# Altium PCB BEAGLEPLAYV020_220915.brd.PcbDoc (part 7 of 12)
Units mil, origin at the board's own origin, x right, y up, seen from the top; angles counter-clockwise.
Board outline 3149.7 x 3149.7 mil, 8 copper layers (TOP, LYR2_GND, LYR3, LAY4_PWR1, LAY5_PWR2, LAY6, LYR7_GND, BOTTOM), stack 60.84 mil thick; 782 components, 546 nets, 2864 pads, 2056 vias.
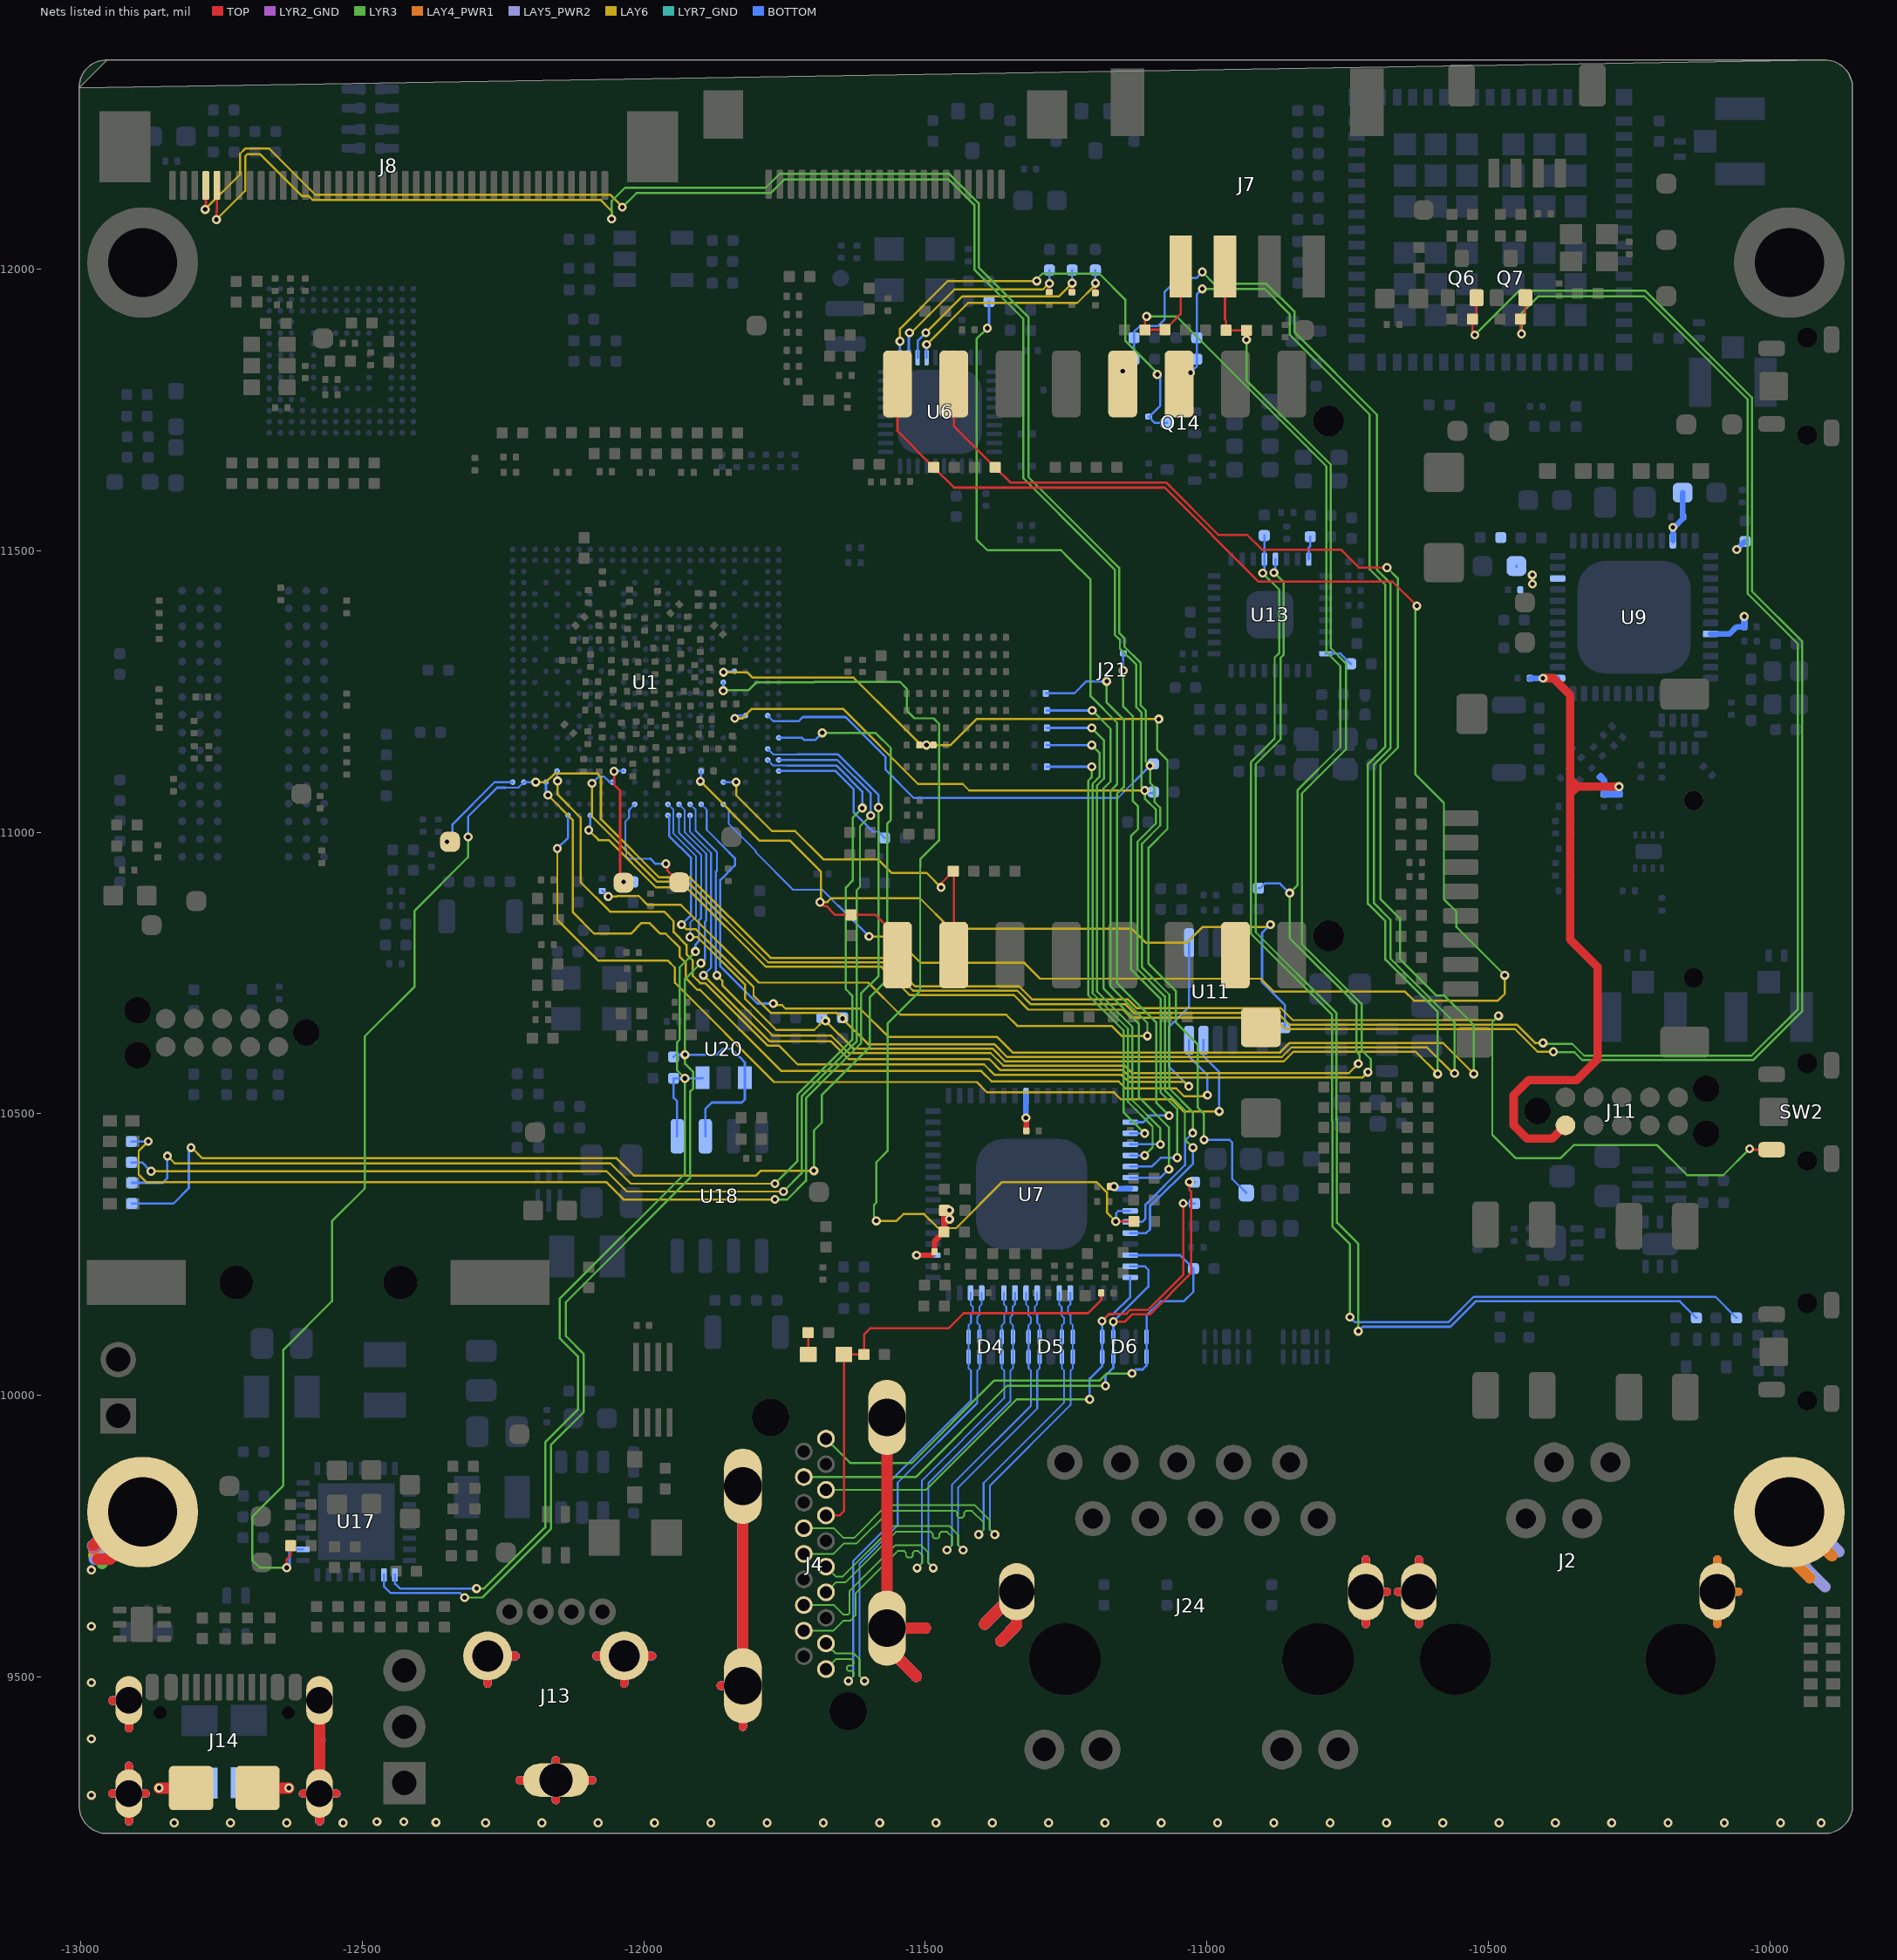
[diagram p13: the nets of this part, all layers, seen from the top]

## Via types
v1: diameter 16/0/16/0/0/0/0/16 (per signal layer), hole 8, TOP to BOTTOM, 334 vias
v2: diameter 16/16/0/0/0/0/16/16 (per signal layer), hole 8, TOP to BOTTOM, 282 vias
v3: diameter 16/0/0/0/0/16/0/16 (per signal layer), hole 8, TOP to BOTTOM, 255 vias
v4: diameter 16/16/0/0/0/16/16/16 (per signal layer), hole 8, TOP to BOTTOM, 253 vias
v5: diameter 16, hole 8, TOP to BOTTOM, 212 vias
v6: diameter 16/16/16/0/0/16/16/16 (per signal layer), hole 8, TOP to BOTTOM, 173 vias
v7: diameter 16/0/0/16/0/0/0/16 (per signal layer), hole 8, TOP to BOTTOM, 131 vias
v8: diameter 16/0/0/0/16/0/0/16 (per signal layer), hole 8, TOP to BOTTOM, 98 vias
v9: diameter 16/16/0/16/0/0/16/16 (per signal layer), hole 8, TOP to BOTTOM, 93 vias
v10: diameter 16/0/16/0/0/16/0/16 (per signal layer), hole 8, TOP to BOTTOM, 87 vias
v11: diameter 16/16/0/16/0/16/16/16 (per signal layer), hole 8, TOP to BOTTOM, 44 vias
v12: diameter 16/16/16/16/0/16/16/16 (per signal layer), hole 8, TOP to BOTTOM, 40 vias
v13: diameter 16/16/16/0/0/0/16/16 (per signal layer), hole 8, TOP to BOTTOM, 19 vias
v14: diameter 16/0/0/16/0/16/0/16 (per signal layer), hole 8, TOP to BOTTOM, 15 vias
v15: diameter 16/0/0/0/16/16/0/16 (per signal layer), hole 8, TOP to BOTTOM, 13 vias
v16: diameter 16/0/16/0/16/0/0/16 (per signal layer), hole 8, TOP to BOTTOM, 3 vias
v17: diameter 16/0/16/16/0/0/0/16 (per signal layer), hole 8, TOP to BOTTOM, 3 vias
v18: diameter 16/16/16/16/0/0/16/16 (per signal layer), hole 8, TOP to BOTTOM, 1 vias

## Nets (pads, with @x,y where several pads share a name; then routed paths per layer and width w, separated by ;. In a path a pad name is that pad's centre, name@x,y a point inside that pad or via, vN(x,y) a via of type N, cw(c..) or ccw(c..) an arc to the next point about the centre after c; other vN are vias at no path point) (continued)
GND_EARTH: C105.2 J2.S1 J2.S2 J4.20 J4.21 J4.22 J4.23 J13.5 J13.6 J13.7 J14.S1 J14.S2 J14.S3 J14.S4 J14.S5 J14.S6 J24.15 J24.16 MH1.1 MH2.1 R38.2 | length 18994.3
  TOP w14: -12943.93,9292.99 J14.S1@-12914.29,9292.99 ; -12943.93,9458.35 J14.S2@-12914.29,9458.35 -12914.29,9409.02 ; -12914.29,9243.66 J14.S1@-12914.29,9292.99 ; -12914.29,9342.32 J14.S1@-12914.29,9292.99 ; -12884.65,9292.99 J14.S1@-12914.29,9292.99 ; -12605.35,9292.99 J14.S3@-12575.71,9292.99 ; -12575.71,9243.66 J14.S3@-12575.71,9292.99 ; -12546.07,9292.99 J14.S3@-12575.71,9292.99 ; -12277.26,9487.93 J13.6@-12277.26,9537.26 -12227.93,9537.26 ; -12220.52,9316.79 J13.7@-12156,9316.79 ; -12156,9281.24 J13.7@-12156,9316.79 ; -12156,9352.34 J13.7@-12156,9316.79 ; -12091.48,9316.79 J13.7@-12156,9316.79 ; -12084.07,9537.26 J13.5@-12034.74,9537.26 ; -12034.74,9487.93 J13.5@-12034.74,9537.26 ; -11985.41,9537.26 J13.5@-12034.74,9537.26 ; -11863.45,9484.44 J4.20@-11823.96,9484.44 -11823.96,9411.49 ; -10717.54,9594.08 J24.16@-10717.54,9651.28 ; -10717.54,9708.48 J24.16@-10717.54,9651.28 ; -10680.02,9651.28 J24.16@-10717.54,9651.28 ; -10660.9,9651.28 J2.S1@-10623.38,9651.28 ; -10623.38,9594.08 J2.S1@-10623.38,9651.28 ; -10623.38,9708.48 J2.S1@-10623.38,9651.28
  TOP w20: -12978,9733 -12918,9793 MH2.1@-12890,9793 -12890,9767 -12947.79,9709.21 -12969.79,9709.21 ; v5(-12860.83,9302.83) J14.S5@-12804.06,9302.83 ; J14.S6@-12685.94,9302.83 v5(-12630.17,9302.83) ; J14.S3@-12575.71,9292.99 J14.S4@-12575.71,9458.35 ; J4.20@-11823.96,9484.44 J4.21@-11823.96,9838.77 ; J4.23@-11568.06,9960.81 J4.22@-11568.06,9586.8 ; -11516,9501 -11568.06,9553.06 J4.22@-11568.06,9586.8 ; -11499.8,9586.8 J4.22@-11568.06,9586.8 ; -11394.9,9594 J24.15@-11337.62,9651.28 -11337.62,9592.38 -11366,9564
  LYR2_GND w15: -12943.93,9292.99 J14.S1@-12914.29,9292.99 ; -12943.93,9458.35 J14.S2@-12914.29,9458.35 -12914.29,9409.02 ; -12914.29,9243.66 J14.S1@-12914.29,9292.99 ; -12914.29,9342.32 J14.S1@-12914.29,9292.99 ; -12884.65,9292.99 J14.S1@-12914.29,9292.99 ; -12605.35,9292.99 J14.S3@-12575.71,9292.99 ; -12575.71,9243.66 J14.S3@-12575.71,9292.99 ; -12575.71,9342.32 J14.S3@-12575.71,9292.99 ; -12546.07,9292.99 J14.S3@-12575.71,9292.99 ; -12277.26,9487.93 J13.6@-12277.26,9537.26 -12227.93,9537.26 ; -12220.52,9316.79 J13.7@-12156,9316.79 ; -12156,9281.24 J13.7@-12156,9316.79 ; -12156,9352.34 J13.7@-12156,9316.79 ; -12091.48,9316.79 J13.7@-12156,9316.79 ; -12084.07,9537.26 J13.5@-12034.74,9537.26 ; -12034.74,9487.93 J13.5@-12034.74,9537.26 ; -11985.41,9537.26 J13.5@-12034.74,9537.26 ; -11863.45,9484.44 J4.20@-11823.96,9484.44 -11823.96,9411.49 ; -10717.54,9594.08 J24.16@-10717.54,9651.28 ; -10717.54,9708.48 J24.16@-10717.54,9651.28 ; -10680.02,9651.28 J24.16@-10717.54,9651.28 ; -10660.9,9651.28 J2.S1@-10623.38,9651.28 ; -10623.38,9594.08 J2.S1@-10623.38,9651.28 ; -10623.38,9708.48 J2.S1@-10623.38,9651.28
  LYR2_GND w20: -12978,9730 -12915,9793 MH2.1@-12890,9793 ; J4.20@-11823.96,9484.44 J4.21@-11823.96,9838.77 ; -11516,9501 -11568.06,9553.06 J4.22@-11568.06,9586.8 -11499.8,9586.8 ; -11394.9,9594 J24.15@-11337.62,9651.28 -11337.62,9592.38 -11366,9564
  LYR3 w13.8: -12943.93,9292.99 J14.S1@-12914.29,9292.99 ; -12943.93,9458.35 J14.S2@-12914.29,9458.35 -12914.29,9409.02 ; -12914.29,9243.66 J14.S1@-12914.29,9292.99 ; -12914.29,9342.32 J14.S1@-12914.29,9292.99 ; -12884.65,9292.99 J14.S1@-12914.29,9292.99 ; -12605.35,9292.99 J14.S3@-12575.71,9292.99 ; -12575.71,9243.66 J14.S3@-12575.71,9292.99 ; -12546.07,9292.99 J14.S3@-12575.71,9292.99 ; -12277.26,9487.93 J13.6@-12277.26,9537.26 -12227.93,9537.26 ; -12220.52,9316.79 J13.7@-12156,9316.79 ; -12156,9281.24 J13.7@-12156,9316.79 ; -12156,9352.34 J13.7@-12156,9316.79 ; -12091.48,9316.79 J13.7@-12156,9316.79 ; -12084.07,9537.26 J13.5@-12034.74,9537.26 ; -12034.74,9487.93 J13.5@-12034.74,9537.26 ; -11985.41,9537.26 J13.5@-12034.74,9537.26 ; -11863.45,9484.44 J4.20@-11823.96,9484.44 -11823.96,9411.49 ; -10717.54,9594.08 J24.16@-10717.54,9651.28 ; -10717.54,9708.48 J24.16@-10717.54,9651.28 ; -10680.02,9651.28 J24.16@-10717.54,9651.28 ; -10660.9,9651.28 J2.S1@-10623.38,9651.28 ; -10623.38,9594.08 J2.S1@-10623.38,9651.28 ; -10623.38,9708.48 J2.S1@-10623.38,9651.28
  LYR3 w20: -12978,9730 -12915,9793 MH2.1@-12890,9793 -12890,9774 -12962.29,9701.71 ; J14.S3@-12575.71,9292.99 J14.S4@-12575.71,9458.35 ; J4.20@-11823.96,9484.44 J4.21@-11823.96,9838.77 ; -11516,9501 -11568.06,9553.06 J4.22@-11568.06,9586.8 -11499.8,9586.8 ; -11394.9,9594 J24.15@-11337.62,9651.28 -11337.62,9592.38 -11366,9564
  LAY4_PWR1 w15: -12943.93,9292.99 J14.S1@-12914.29,9292.99 ; -12943.93,9458.35 J14.S2@-12914.29,9458.35 -12914.29,9409.02 ; -12914.29,9243.66 J14.S1@-12914.29,9292.99 ; -12914.29,9342.32 J14.S1@-12914.29,9292.99 ; -12884.65,9292.99 J14.S1@-12914.29,9292.99 ; -12605.35,9292.99 J14.S3@-12575.71,9292.99 ; -12575.71,9243.66 J14.S3@-12575.71,9292.99 ; -12546.07,9292.99 J14.S3@-12575.71,9292.99 ; -12277.26,9487.93 J13.6@-12277.26,9537.26 -12227.93,9537.26 ; -12220.52,9316.79 J13.7@-12156,9316.79 ; -12156,9281.24 J13.7@-12156,9316.79 ; -12156,9352.34 J13.7@-12156,9316.79 ; -12091.48,9316.79 J13.7@-12156,9316.79 ; -12084.07,9537.26 J13.5@-12034.74,9537.26 ; -12034.74,9487.93 J13.5@-12034.74,9537.26 ; -11985.41,9537.26 J13.5@-12034.74,9537.26 ; -11863.45,9484.44 J4.20@-11823.96,9484.44 -11823.96,9411.49 ; -10717.54,9594.08 J24.16@-10717.54,9651.28 ; -10717.54,9708.48 J24.16@-10717.54,9651.28 ; -10680.02,9651.28 J24.16@-10717.54,9651.28 ; -10660.9,9651.28 J2.S1@-10623.38,9651.28 ; -10623.38,9594.08 J2.S1@-10623.38,9651.28 ; -10623.38,9708.48 J2.S1@-10623.38,9651.28 ; -10093.46,9594.08 J2.S2@-10093.46,9651.28 ; -10093.46,9708.48 J2.S2@-10093.46,9651.28 ; -10055.94,9651.28 J2.S2@-10093.46,9651.28
  LAY4_PWR1 w20: -12977,9725 -12909,9793 MH2.1@-12890,9793 ; J14.S3@-12575.71,9292.99 J14.S4@-12575.71,9458.35 ; J4.20@-11823.96,9484.44 J4.21@-11823.96,9838.77 ; -11516,9501 -11568.06,9553.06 J4.22@-11568.06,9586.8 -11499.8,9586.8 ; -11394.9,9594 J24.15@-11337.62,9651.28 -11337.62,9592.38 -11366,9564 ; MH1.1@-9965.3,9793 MH1.1@-9965.3,9790.3 ; -9929,9676 -9965.3,9712.3 MH1.1@-9965.3,9790.3 ; -9890,9715 MH1.1@-9965.3,9790.3
  LAY5_PWR2 w15: -12943.93,9292.99 J14.S1@-12914.29,9292.99 ; -12943.93,9458.35 J14.S2@-12914.29,9458.35 -12914.29,9409.02 ; -12914.29,9243.66 J14.S1@-12914.29,9292.99 ; -12914.29,9342.32 J14.S1@-12914.29,9292.99 ; -12884.65,9292.99 J14.S1@-12914.29,9292.99 ; -12605.35,9292.99 J14.S3@-12575.71,9292.99 ; -12575.71,9243.66 J14.S3@-12575.71,9292.99 ; -12546.07,9292.99 J14.S3@-12575.71,9292.99 ; -12277.26,9487.93 J13.6@-12277.26,9537.26 -12227.93,9537.26 ; -12220.52,9316.79 J13.7@-12156,9316.79 ; -12156,9281.24 J13.7@-12156,9316.79 ; -12156,9352.34 J13.7@-12156,9316.79 ; -12091.48,9316.79 J13.7@-12156,9316.79 ; -12084.07,9537.26 J13.5@-12034.74,9537.26 ; -12034.74,9487.93 J13.5@-12034.74,9537.26 ; -11985.41,9537.26 J13.5@-12034.74,9537.26 ; -11863.45,9484.44 J4.20@-11823.96,9484.44 -11823.96,9411.49 ; -10717.54,9594.08 J24.16@-10717.54,9651.28 ; -10717.54,9708.48 J24.16@-10717.54,9651.28 ; -10680.02,9651.28 J24.16@-10717.54,9651.28 ; -10660.9,9651.28 J2.S1@-10623.38,9651.28 ; -10623.38,9594.08 J2.S1@-10623.38,9651.28 ; -10623.38,9708.48 J2.S1@-10623.38,9651.28 ; -10093.46,9594.08 J2.S2@-10093.46,9651.28 ; -10093.46,9708.48 J2.S2@-10093.46,9651.28 ; -10055.94,9651.28 J2.S2@-10093.46,9651.28
  LAY5_PWR2 w20: -12974.5,9711.5 -12893,9793 MH2.1@-12890,9793 ; J14.S3@-12575.71,9292.99 J14.S4@-12575.71,9458.35 ; J4.20@-11823.96,9484.44 J4.21@-11823.96,9838.77 ; -11516,9501 -11568.06,9553.06 J4.22@-11568.06,9586.8 -11499.8,9586.8 ; -11394.9,9594 J24.15@-11337.62,9651.28 -11337.62,9592.38 -11366,9564 ; -9902,9660 -9965.3,9723.3 MH1.1@-9965.3,9793 -9948,9793 -9877.5,9722.5
  LAY6 w13.8: -12943.93,9292.99 J14.S1@-12914.29,9292.99 ; -12943.93,9458.35 J14.S2@-12914.29,9458.35 -12914.29,9409.02 ; -12914.29,9243.66 J14.S1@-12914.29,9292.99 ; -12914.29,9342.32 J14.S1@-12914.29,9292.99 ; -12884.65,9292.99 J14.S1@-12914.29,9292.99 ; -12605.35,9292.99 J14.S3@-12575.71,9292.99 ; -12575.71,9243.66 J14.S3@-12575.71,9292.99 ; -12546.07,9292.99 J14.S3@-12575.71,9292.99 ; -12277.26,9487.93 J13.6@-12277.26,9537.26 -12227.93,9537.26 ; -12220.52,9316.79 J13.7@-12156,9316.79 ; -12156,9281.24 J13.7@-12156,9316.79 ; -12156,9352.34 J13.7@-12156,9316.79 ; -12091.48,9316.79 J13.7@-12156,9316.79 ; -12084.07,9537.26 J13.5@-12034.74,9537.26 ; -12034.74,9487.93 J13.5@-12034.74,9537.26 ; -11985.41,9537.26 J13.5@-12034.74,9537.26 ; -11863.45,9484.44 J4.20@-11823.96,9484.44 -11823.96,9411.49 ; -10717.54,9594.08 J24.16@-10717.54,9651.28 ; -10717.54,9708.48 J24.16@-10717.54,9651.28 ; -10680.02,9651.28 J24.16@-10717.54,9651.28 ; -10660.9,9651.28 J2.S1@-10623.38,9651.28 ; -10623.38,9594.08 J2.S1@-10623.38,9651.28 ; -10623.38,9708.48 J2.S1@-10623.38,9651.28
  LAY6 w20: -12977,9716 -12900,9793 MH2.1@-12890,9793 ; J14.S3@-12575.71,9292.99 J14.S4@-12575.71,9458.35 ; J4.20@-11823.96,9484.44 J4.21@-11823.96,9838.77 ; -11516,9501 -11568.06,9553.06 J4.22@-11568.06,9586.8 -11499.8,9586.8 ; -11394.9,9594 J24.15@-11337.62,9651.28 -11337.62,9592.38 -11366,9564
  LYR7_GND w15: -12943.93,9292.99 J14.S1@-12914.29,9292.99 ; -12943.93,9458.35 J14.S2@-12914.29,9458.35 -12914.29,9409.02 ; -12914.29,9243.66 J14.S1@-12914.29,9292.99 ; -12914.29,9342.32 J14.S1@-12914.29,9292.99 ; -12884.65,9292.99 J14.S1@-12914.29,9292.99 ; -12605.35,9292.99 J14.S3@-12575.71,9292.99 ; -12575.71,9243.66 J14.S3@-12575.71,9292.99 ; -12546.07,9292.99 J14.S3@-12575.71,9292.99 ; -12277.26,9487.93 J13.6@-12277.26,9537.26 -12227.93,9537.26 ; -12220.52,9316.79 J13.7@-12156,9316.79 ; -12156,9281.24 J13.7@-12156,9316.79 ; -12156,9352.34 J13.7@-12156,9316.79 ; -12091.48,9316.79 J13.7@-12156,9316.79 ; -12084.07,9537.26 J13.5@-12034.74,9537.26 ; -12034.74,9487.93 J13.5@-12034.74,9537.26 ; -11985.41,9537.26 J13.5@-12034.74,9537.26 ; -11863.45,9484.44 J4.20@-11823.96,9484.44 -11823.96,9411.49 ; -10717.54,9594.08 J24.16@-10717.54,9651.28 ; -10717.54,9708.48 J24.16@-10717.54,9651.28 ; -10680.02,9651.28 J24.16@-10717.54,9651.28 ; -10660.9,9651.28 J2.S1@-10623.38,9651.28 ; -10623.38,9594.08 J2.S1@-10623.38,9651.28 ; -10623.38,9708.48 J2.S1@-10623.38,9651.28
  LYR7_GND w20: -12979,9733 -12919,9793 MH2.1@-12890,9793 ; J14.S3@-12575.71,9292.99 J14.S4@-12575.71,9458.35 ; J4.20@-11823.96,9484.44 J4.21@-11823.96,9838.77 ; -11516,9501 -11568.06,9553.06 J4.22@-11568.06,9586.8 -11499.8,9586.8 ; -11394.9,9594 J24.15@-11337.62,9651.28 -11337.62,9592.38 -11366,9564
  BOTTOM w14: -12943.93,9292.99 J14.S1@-12914.29,9292.99 ; -12943.93,9458.35 J14.S2@-12914.29,9458.35 -12914.29,9409.02 ; -12914.29,9243.66 J14.S1@-12914.29,9292.99 ; -12914.29,9342.32 J14.S1@-12914.29,9292.99 ; -12884.65,9292.99 J14.S1@-12914.29,9292.99 ; -12605.35,9292.99 J14.S3@-12575.71,9292.99 ; -12575.71,9243.66 J14.S3@-12575.71,9292.99 ; -12575.71,9342.32 J14.S3@-12575.71,9292.99 ; -12546.07,9292.99 J14.S3@-12575.71,9292.99 ; -12277.26,9487.93 J13.6@-12277.26,9537.26 -12227.93,9537.26 ; -12220.52,9316.79 J13.7@-12156,9316.79 ; -12156,9281.24 J13.7@-12156,9316.79 ; -12156,9352.34 J13.7@-12156,9316.79 ; -12091.48,9316.79 J13.7@-12156,9316.79 ; -12084.07,9537.26 J13.5@-12034.74,9537.26 ; -12034.74,9487.93 J13.5@-12034.74,9537.26 ; -11985.41,9537.26 J13.5@-12034.74,9537.26 ; -11863.45,9484.44 J4.20@-11823.96,9484.44 -11823.96,9411.49 ; -10717.54,9594.08 J24.16@-10717.54,9651.28 ; -10717.54,9708.48 J24.16@-10717.54,9651.28 ; -10680.02,9651.28 J24.16@-10717.54,9651.28 ; -10660.9,9651.28 J2.S1@-10623.38,9651.28 ; -10623.38,9594.08 J2.S1@-10623.38,9651.28 ; -10623.38,9708.48 J2.S1@-10623.38,9651.28
  BOTTOM w20: -12976,9709 -12974,9709 MH2.1@-12890,9793 ; J14.S4@-12575.71,9458.35 -12575.71,9388.71 -12575,9388 ; J4.20@-11823.96,9484.44 J4.21@-11823.96,9838.77 ; -11516,9501 -11568.06,9553.06 J4.22@-11568.06,9586.8 -11499.8,9586.8 ; -11394.9,9594 J24.15@-11337.62,9651.28 -11337.62,9592.38 -11366,9564
  other v5: -12834,9241 -12734,9241 -12634,9241 -12534,9241 -12281,9241 -12181,9241 -12081,9241 -11981,9241 -11881,9241 -11781,9241 -11681,9241 -11581,9241 -11481,9241 -11381,9241 -11281,9241 -11181,9241 -11081,9241 -10981,9241 -10881,9241 -10781,9241 -10681,9241 -10581,9241 -10481,9241 -10381,9241 -10281,9241 -10181,9241 -10081,9241 -9981,9241 -9909,9241 -12369,9242 -12474,9243 -12426,9243 -12981,9290 -12981,9390 -12981,9490 -12981,9590 -12981,9690
GPIO1: R116.1 U13.32 | length 41.2
  BOTTOM w4: U13.32@-10819.05,11485 -10819.05,11505.31 -10816.21,11508.15 R116.1@-10816.21,11525
GPIO1_9: D37.2 J21.7 U1.B18 | length 3699.3
  TOP w4: J21.7@-11449.39,11796.09 -11449.39,11721.6 D37.2@-11375.79,11648 -11348.79,11621 -11072.68,11621 -10979.68,11528 -10928,11528 -10902,11502 -10762,11502 -10730,11470 v1(-10680,11470)
  LYR3 w3.8: v1(-10680,11470) -10661,11451 -10661,11150 -10692,11119 -10692,10882 -10657,10847 -10657,10775 -10592,10710 -10578,10710 -10526,10658 v10(-10526,10571)
  LAY6 w3.8: v3(-11770,10695.9) -11767.1,10693 -11754.29,10693 -11748.29,10687 -11616,10687 -11565.8,10636.8 -11372.56,10636.8 -11344.76,10609 -10870,10609 -10853,10626 -10581,10626 v10(-10526,10571)
  BOTTOM w3.2: U1.B18@-11898.08,11049.66 -11888.28,11039.86 -11888.28,11004.17 -11848,10963.89
  BOTTOM w4: -11848,10963.89 -11838,10953.89 -11838,10940.99 -11864,10914.99 -11864,10762 -11797.9,10695.9 v3(-11770,10695.9)
GPIO1_10: D31.2 J21.9 R68.2 U1.E18 | length 1604.3
  TOP w4: v3(-11687,10876) -11680,10869 -11676,10869 -11660.21,10853.21 D31.2@-11632,10853.21 -11588.21,10853.21 -11549.39,10814.39 J21.9@-11549.39,10781.91
  LAY6 w3.8: v3(-11899.58,11090.68) -11793.9,10985 -11739.99,10985 -11685,10930.01 v3@-11685,10876 ; v3(-11687,10876) v3@-11685,10876 ; v3(-10887,10836) -10891,10832 -11007,10832 -11035,10804 -11108.69,10804 -11133.69,10829 -11455.69,10829 -11509.49,10882.8 -11667.2,10882.8 -11674,10876 v3@-11685,10876
  BOTTOM w4: v3(-11899.58,11090.68) -11898.08,11092.18 U1.E18@-11898.08,11108.72 ; v3(-10887,10836) -10902,10821 -10902,10734 -10861.44,10693.44 R68.2@-10861.44,10652.85
GPIO1_11: D36.2 J21.8 U1.B20 | length 3444.2
  TOP w4: J21.8@-11549.39,11796.09 -11549.39,11712.39 D36.2@-11485,11648 -11449,11612 -11075,11612 -10908,11445 -10670,11445 v1(-10627,11402)
  LYR3 w3.8: v1(-10627,11402) -10627,11400 -10630,11397 -10630,11103.01 -10579,11052.01 -10579,10881 -10557,10859 -10557,10832 v10(-10471,10746)
  LAY6 w3.8: v3(-11600,10815) -11555,10815 -11508,10768 -11324,10768 -11296,10740 -10904.05,10740 -10881.05,10717 -10648.12,10717 -10632.12,10701 -10483,10701 -10471,10713 v10(-10471,10746)
  BOTTOM w3.2: U1.B20@-11858.7,11049.66 -11848.9,11039.86 -11848.9,11014.7 -11801,10966.8 -11801,10964.01 -11734.99,10898 -11683,10898 -11655,10870
  BOTTOM w4: -11655,10870 v3(-11600,10815)
GPIO1_12: D45.2 J21.10 U1.D20 | length 665.2
  TOP w4: v3(-11472,10902) -11472,10909.21 D45.2@-11450.21,10931 cw(c-11452.19,10929.02) -11449.39,10929.02 J21.10@-11449.39,10781.91
  LAY6 w3.8: -11835.84,11065.72 -11772.12,11002 -11731,11002 -11681,10952 -11584.2,10952 -11560.2,10928 -11498,10928 v3(-11472,10902)
  LAY6 w4: -11835.84,11065.72 v3(-11835.84,11089.04)
  BOTTOM w4: U1.D20@-11858.7,11089.04 v3(-11835.84,11089.04)
GPIO2: R112.1 U13.8 | length 51.9
  BOTTOM w4: U13.8@-10789,11317.05 -10762.4,11317.05 R112.1@-10744.49,11299.14
HDMI_AVCC: C240.1 C241.1 C242.1 C275.1 FB18.1 U7.8 U7.35 U7.56 | length 284.3
  TOP w4: C240.1@-11172.4,10370.93 -11172.33,10371 v7(-11165,10371)
  TOP w10: v7(-11515.5,10248.98) -11489.49,10248.98 C241.1@-11483.6,10254.87 -11483.6,10273.74 C275.1@-11466.94,10290.4 -11466.94,10303.06 ; v7(-11321.33,10493) -11320.6,10492.27 C242.1@-11320.6,10469.67 ; -11466.94,10303.06 -11466.94,10327.6 FB18.1@-11465.94,10328.6 v7(-11457,10328.6) v7(-11457,10313) -11466.94,10303.06
  BOTTOM w10: v7(-11515.5,10248.98) -11515,10248.98 -11514.95,10248.93 U7.35@-11486.43,10248.93 ; v7(-11321.33,10493) -11321.07,10493.26 U7.56@-11321.07,10532.4 ; v7(-11165,10371) -11161.04,10367.04 U7.8@-11136.03,10367.04
HDMI_CEC: D7.2 D63.2 J4.13 R258.2 | length 844.2
  TOP w4: J4.13@-11676.32,9786.8 -11652.2,9786.8 -11644,9795 -11644,10071.93 D63.2@-11644.73,10072.66 D7.2@-11608.96,10072.66 -11608.96,10108.04 -11598,10119 -11459,10119 -11432,10146 -11211,10146 -11187.7,10169.3 R258.2@-11187.7,10182
HDMI_CEC_D: D63.1 R63.2 | length 38.9
  TOP w4: R63.2@-11708.21,10111.34 -11707.73,10110.86 D63.1@-11707.73,10072.66
HDMI_DSCL: D6.1 D6.10 J4.15 R65.2 U7.16 | length 1110.7
  TOP w4: v5(-11186.05,10132.06) -11173.11,10145 -11142.69,10145 -11135.82,10151.87 -11104.45,10151.87 -11042,10214.32 v5(-11042,10341)
  LYR3 w3.8: J4.15@-11676.32,9832.27 -11498.73,9832.27 -11338,9993 v1(-11208,9993)
  BOTTOM w4: v1(-11208,9993) -11208,10030 -11185.76,10052.24 D6.10@-11185.76,10068.65 D6.1@-11185.76,10104.09 -11185.76,10131.77 v5(-11186.05,10132.06) -11173.11,10145 -11166,10145 -11136.03,10174.97 U7.16@-11136.03,10209.56 ; v5(-11042,10341) -11041.86,10340.86 R65.2@-11021.85,10340.86
HDMI_DSDA: D6.2 D6.9 J4.16 R64.2 U7.15 | length 1220.9
  TOP w4: v5(-11166.08,10130.92) -11145.45,10130.92 -11132.5,10143.87 -11101.13,10143.87 -11028,10217 -11028,10362 -11031,10365 v5(-11031,10378.86)
  LYR3 w3.8: J4.16@-11715.7,9855.03 -11516.97,9855.03 -11355,10017 v1(-11180,10017)
  BOTTOM w4: v1(-11180,10017) -11180,10035 -11166.08,10048.92 D6.9@-11166.08,10068.65 D6.2@-11166.08,10104.09 v5(-11166.08,10130.92) -11104,10193 -11104,10223 -11110.25,10229.25 U7.15@-11136.03,10229.25 ; v5(-11031,10378.86) R64.2@-11021.81,10378.86
HDMI_HPD: D6.5 D6.6 J4.19 R66.1 U7.14 | length 1011.7
  LYR3 w3.8: J4.19@-11676.32,9923.22 -11633.1,9880 -11524,9880 -11378,10026 -11190.66,10026 -11177.66,10039 v1(-11133,10039)
  BOTTOM w4: U7.14@-11136.03,10248.93 -11047.48,10248.93 R66.1@-11023.69,10225.14 -11023.69,10184.31 -11041,10167 -11082,10167 -11107.02,10141.98 D6.5@-11107.02,10104.09 D6.6@-11107.02,10068.65 -11107.02,10052.98 -11114,10046 -11126,10046 v1(-11133,10039)
HDMI_INT: R257.2 U1.N20 U7.10 | length 1988.6
  TOP w4: v3(-11161.81,10309) R257.2@-11129.41,10309
  LYR3 w3.8: -11697,11267 -11545,11267 -11533,11255 -11533,11216 -11519.36,11202.36 -11485.36,11202.36 -11475.66,11192.66 -11475.66,10985.34 -11509.1,10951.9 -11509.1,10938.24 ; v10(-11586.9,10310) -11591.2,10314.3 -11591.2,10338 -11586.9,10342.3 -11586.9,10414.19 -11567,10434.09 -11567,10660.26 -11509.13,10718.13 -11509.13,10938.21
  LYR3 w4: v1(-11858.7,11251.3) -11858.02,11251.98 -11814.42,11251.98 -11800.4,11266 -11698,11266 -11697,11267
  LAY6 w3.8: v10(-11586.9,10310) -11551,10310 -11539,10322 -11502,10322 -11477,10297 -11445.31,10297 -11363.51,10378.8 -11195.8,10378.8 -11177.54,10360.54 -11177.54,10324.73 v3(-11161.81,10309)
  BOTTOM w4: v1(-11858.7,11251.3) U1.N20@-11858.7,11266.2 ; v3(-11161.81,10309) -11161,10309.81 -11161,10323.67 -11157,10327.67 U7.10@-11136.03,10327.67
HDMI_RSTN: D58.2 R177.2 R194.1 U1.P21 | length 1853.5
  TOP w4: R177.2@-11510.9,11154.86 v3(-11498,11154.86) R194.1@-11485.4,11154.86
  LYR3 w3.8: v10(-11085.3,11201) -11088,11198.3 -11088,11145.79 -11070,11127.79 -11070,11005.99 -11103.4,10972.59 -11103.4,10766.41 -11054.8,10717.81 -11054.8,10662 -11016,10623.2 -11016,10510.77 -11005,10499.77 v1(-11005,10454)
  LAY6 w3.8: -11661.97,11274.45 -11627.18,11274.45 -11549.39,11196.66 ; -11549.34,11196.66 -11507.54,11154.86 ; v3(-11498,11154.86) -11455.14,11154.86 -11409,11201 v10(-11085.3,11201)
  LAY6 w4: v3(-11858.4,11284.28) -11816.27,11284.28 -11806.44,11274.45 -11661.97,11274.45 ; -11507.54,11154.86 v3(-11498,11154.86)
  BOTTOM w4: v3(-11858.4,11284.28) -11856.8,11285.88 U1.P21@-11839.02,11285.88 ; v1(-11005,10454) -10960,10454 -10955,10449 -10955,10384.5 D58.2@-10930,10359.5
HDMI_TX0+: D5.1 D5.10 J4.7 U7.25 | length 840.9
  LYR3 w3: J4.7@-11676.32,9650.38 -11658.74,9667.96 -11642.04,9667.96 -11552.3,9757.7 -11489.87,9757.7 -11486.87,9754.7 -11486.87,9749 -11483.87,9746 -11477.87,9746 -11474.87,9749 -11474.87,9754.7 -11471.87,9757.7 -11461.3,9757.7 -11452.3,9748.7 -11452.3,9734.66 v1(-11461.47,9725.49)
  BOTTOM w3.3: v1(-11461.47,9725.49) -11452.8,9734.16 -11452.8,9841.19 -11312.45,9981.54 -11312.45,10044.03 -11316.64,10048.22 D5.10@-11316.64,10068.65 D5.1@-11316.64,10104.09 -11316.64,10124.52 -11312.45,10128.71 -11312.45,10137.88 -11316.88,10142.31 -11316.88,10157.38 -11321.07,10161.57 U7.25@-11321.07,10182
HDMI_TX0-: D5.2 D5.9 J4.9 U7.24 | length 841.6
  LYR3 w3: J4.9@-11676.32,9695.85 -11658.73,9678.26 -11646.31,9678.26 -11556.57,9768 -11457.03,9768 -11442,9752.97 -11442,9734.67 v1(-11432.82,9725.49)
  BOTTOM w3.3: v1(-11432.82,9725.49) -11441.5,9734.17 -11441.5,9836.5 -11301.15,9976.85 -11301.15,10044.03 -11296.96,10048.22 D5.9@-11296.96,10068.65 D5.2@-11296.96,10104.09 -11296.96,10124.52 -11301.15,10128.71 -11301.15,10142.57 -11305.58,10147 -11305.58,10157.38 -11301.39,10161.57 U7.24@-11301.39,10182
HDMI_TX1+: D4.4 D4.7 J4.4 U7.27 | length 897.4
  LYR3 w3: J4.4@-11715.7,9582.19 -11663.09,9582.19 -11645,9600.28 -11633.03,9600.28 -11624,9609.31 -11624,9648.43 -11548.73,9723.7 -11537.31,9723.7 -11534.31,9720.7 -11534.31,9715 -11531.31,9712 -11525.31,9712 -11522.31,9715 -11522.31,9720.7 -11519.31,9723.7 -11512.31,9723.7 -11505.3,9716.69 -11505.3,9702.67 v1(-11514.47,9693.5)
  BOTTOM w3.3: v1(-11514.47,9693.5) -11505.79,9702.18 -11505.79,9849.2 -11359.92,9995.07 -11359.92,10044.03 -11364.11,10048.22 D4.7@-11364.11,10068.65 D4.4@-11364.11,10104.09 -11364.11,10124.52 -11359.92,10128.71 -11359.92,10144.07 -11356.25,10147.74 -11356.25,10157.38 -11360.44,10161.57 U7.27@-11360.44,10182
HDMI_TX1-: D4.5 D4.6 J4.6 U7.26 | length 897.7
  LYR3 w3: J4.6@-11715.7,9627.66 -11662.08,9627.66 -11645,9610.58 -11637.3,9610.58 -11634.3,9613.58 -11634.3,9652.7 -11553,9734 -11508.04,9734 -11495,9720.96 -11495,9702.68 v1(-11485.82,9693.5)
  BOTTOM w3.3: v1(-11485.82,9693.5) -11494.49,9702.17 -11494.49,9844.51 -11348.62,9990.38 -11348.62,10044.03 -11344.43,10048.22 D4.6@-11344.43,10068.65 D4.5@-11344.43,10104.09 -11344.43,10124.52 -11348.62,10128.71 -11348.62,10139.38 -11344.95,10143.05 -11344.95,10157.38 -11340.76,10161.57 U7.26@-11340.76,10182
HDMI_TX2+: D4.1 D4.10 J4.1 U7.30 | length 900.2
  LYR3 w3: J4.1@-11676.32,9513.96 -11658.73,9531.55 -11631.29,9531.55 -11627.3,9527.56 -11627.3,9522.7 -11630,9520 -11637,9520 -11639,9518 -11639,9513 -11636.87,9510.87 -11630.17,9510.87 -11627.3,9508 -11627.3,9501.99 v1(-11636.47,9492.82)
  BOTTOM w3.3: v1(-11636.47,9492.82) -11627.95,9501.34 -11627.95,9706.04 -11560.3,9773.69 -11560.3,9849.69 -11418.98,9991.01 -11418.98,10044.03 -11423.17,10048.22 D4.10@-11423.17,10068.65 D4.1@-11423.17,10104.09 -11423.17,10124.52 -11418.98,10128.71 -11418.98,10144.07 -11415.31,10147.74 -11415.31,10157.37 -11419.5,10161.56 U7.30@-11419.5,10182
HDMI_TX2-: D4.2 D4.9 J4.3 U7.29 | length 899.7
  LYR3 w3: J4.3@-11676.32,9559.44 -11658.73,9541.85 -11627.02,9541.85 -11617,9531.83 -11617,9502 v1(-11607.82,9492.82)
  BOTTOM w3.3: v1(-11607.82,9492.82) -11616.65,9501.65 -11616.65,9701.35 -11549,9769 -11549,9845 -11407.68,9986.32 -11407.68,10044.03 -11403.49,10048.22 D4.9@-11403.49,10068.65 D4.2@-11403.49,10104.09 -11403.49,10124.52 -11407.68,10128.71 -11407.68,10139.38 -11404.01,10143.05 -11404.01,10157.37 -11399.81,10161.57 U7.29@-11399.81,10182
HDMI_TXC+: D5.4 D5.7 J4.10 U7.22 | length 900.7
  LYR3 w3: J4.10@-11715.7,9718.61 -11663.09,9718.61 -11645,9736.7 -11622.3,9736.7 -11564,9795 -11446.25,9795 -11443.25,9792 -11443.25,9786 -11440.25,9783 -11434.25,9783 -11431.25,9786 -11431.25,9792 -11428.25,9795 -11417,9795 -11396,9774 -11396,9762.18 v1(-11405.18,9753)
  BOTTOM w3.3: v1(-11405.18,9753) -11396.5,9761.68 -11396.5,9844.5 -11253.39,9987.61 -11253.39,10044.03 -11257.58,10048.22 D5.7@-11257.58,10068.65 D5.4@-11257.58,10104.09 -11257.58,10124.52 -11253.39,10128.71 -11253.39,10137.38 -11257.83,10141.82 -11257.83,10157.37 -11262.02,10161.56 U7.22@-11262.02,10182
HDMI_TXC-: D5.5 D5.6 J4.12 U7.21 | length 900.4
  LYR3 w3: J4.12@-11715.7,9764.08 -11662.08,9764.08 -11645,9747 -11626.57,9747 -11568.27,9805.3 -11412.73,9805.3 -11385.7,9778.27 -11385.7,9762.17 v1(-11376.53,9753)
  BOTTOM w3.3: v1(-11376.53,9753) -11385.2,9761.67 -11385.2,9839.81 -11242.09,9982.92 -11242.09,10044.03 -11237.9,10048.22 D5.6@-11237.9,10068.65 D5.5@-11237.9,10104.09 -11237.9,10124.52 -11242.09,10128.71 -11242.09,10142.07 -11246.53,10146.51 -11246.53,10157.37 -11242.33,10161.57 U7.21@-11242.33,10182
I2C0_SCL: R144.2 U1.B16 U17.10 U18.6 U20.1 | length 2169.3
  LYR3 w3.8: v1(-12318,9641) -12287,9641 -12164.4,9763.6 -12164.4,9912.6 -12106.4,9970.6 -12106.4,10073.4 -12138.4,10105.4 -12138.4,10165.6 -11917.8,10386.2 -11917.8,10539.2 -11912,10545 -11912,10574 -11926.74,10588.74 v1(-11926.74,10605) -11926.74,10739.26 v1(-11898.5,10767.5)
  BOTTOM w3.2: U1.B16@-11937.44,11049.66 -11927.64,11039.86 -11927.64,11000.34 -11889,10961.7 -11889,10843.16
  BOTTOM w3.8: R144.2@-11946.99,10601.14 -11943.13,10605 v1(-11926.74,10605) -11870.22,10605 -11859.25,10615.97 -11844.97,10615.97 -11830.14,10601.14 ; v1(-11898.5,10767.5) -11891,10775 -11891,10841.16 -11889,10843.16
  BOTTOM w4: U17.10@-12461.48,9681.31 -12461.48,9661.48 -12449,9649 -12326,9649 v1(-12318,9641) ; U18.6@-11890.66,10460.16 -11890.66,10508.34 -11879,10520 -11826,10520 -11820.47,10525.53 U20.1@-11820.47,10563.94 -11820.47,10591.47 -11830.14,10601.14
I2C0_SDA: R143.2 U1.A16 U17.9 U18.5 U20.3 | length 1921.8
  LYR3 w3.8: v1(-12297,9657) -12283.6,9657 -12175,9765.6 -12175,9917 -12117,9975 -12117,10069 -12149,10101 -12149,10172 -11926.86,10394.14 v1(-11926.86,10563.14) -11940.64,10576.92 -11940.64,10627.36 -11936,10632 -11936,10760.47 v1(-11908.24,10788.23)
  BOTTOM w3.2: U1.A16@-11937.44,11029.98 -11937.44,10999.14 -11898,10959.7 -11898,10891.25
  BOTTOM w3.8: R143.2@-11947.03,10563.14 v1(-11926.86,10563.14) -11896.27,10563.14 U20.3@-11895.47,10563.94
  BOTTOM w4: U17.9@-12441.79,9681.31 -12441.79,9665.79 -12433,9657 v1(-12297,9657) ; R143.2@-11947.03,10563.14 -11947.03,10528.37 -11940.66,10522 U18.5@-11940.66,10460.16 ; v1(-11908.24,10788.23) -11908.24,10800.75 -11902.5,10806.49 -11902.5,10843.5 -11898,10848 -11898,10891.25
I2C1_SCL: D20.2 J7.1 R67.1 R142.2 U1.B17 | length 3388
  TOP w4: v1(-11107,11916) -11109.77,11913.23 R142.2@-11109.77,11892.16 -11109.46,11892.47 D20.2@-11074.27,11892.47 -11046.46,11920.28 J7.1@-11046.46,12005.04
  LYR3 w3.8: v1(-11107,11916) -11054.04,11916 -10787.8,11649.76 -10787.8,11319.8 -10763,11295 -10763,11150.8 -10839,11074.8 -10839,10906 v1(-10853,10892) -10853,10812.28 -10734,10693.28 -10734,10610.4 -10729,10605.4 -10729,10591 v10(-10731,10589)
  LAY6 w3.8: v3(-11870,10746) -11860.52,10736.52 -11860.52,10728.52 -11771,10639 -11666.99,10639 -11635.99,10608 -11384,10608 -11361.4,10585.4 -11145.71,10585.4 -11132.91,10572.6 -10747.4,10572.6 v10(-10731,10589)
  BOTTOM w3.2: U1.B17@-11917.76,11049.66 -11907.88,11039.78 -11907.88,11002.58 -11870,10964.7 -11870,10932.1
  BOTTOM w4: v3(-11870,10746) -11872,10748 -11872,10930.1 -11870,10932.1 ; R67.1@-10908.41,10900.56 -10905.44,10900.56 -10897,10909 -10870,10909 v1(-10853,10892)
I2C1_SDA: D19.2 J7.2 R140.2 U1.A17 | length 3190.1
  TOP w4: J7.2@-10967.72,12005.04 -10967.72,11910.33 -10965.77,11908.38 D19.2@-10965.77,11891.53 -10965.68,11891.44 R140.2@-10929.59,11891.44 v1(-10929.59,11874.73)
  LYR3 w3.8: v1(-10929.59,11874.73) -10929.59,11802.59 -10780,11653 -10780,11327 -10753,11300 -10753,11147 -10831.2,11068.8 -10831.2,10801.52 -10725,10695.32 -10725,10613 -10709,10597 -10709,10579 v10(-10714,10574)
  LAY6 w3.8: v3(-11894,10746) -11777,10629 -11668.04,10629 -11636.04,10597 -11386,10597 -11366.4,10577.4 -11148.75,10577.4 -11136.15,10564.8 -10723.2,10564.8 v10(-10714,10574)
  BOTTOM w3.2: U1.A17@-11917.76,11029.98 -11917.76,11000.65 -11880.5,10963.39 -11880.5,10932.2
  BOTTOM w4: v3(-11894,10746) -11880.5,10759.5 -11880.5,10932.2
I2C2_SCL: J8.37 R234.2 U1.K22 U7.12 | length 4468.5
  TOP w4: v3(-12779,12106) -12777.8,12107.2 J8.37@-12777.8,12148.55
  LYR3 w3.8: v10(-12038,12110) -12013,12135 -11775,12135 -11751,12159 -11458,12159 -11413,12114 -11413,11999 -11326,11912 -11326,11628.94 -11200.2,11503.14 -11200.2,11503.05 -11163.6,11466.45 -11163.6,11350.72 -11154.4,11341.52 -11154.4,11326.52 -11125.2,11297.32 -11125.2,11222.04 -11116.2,11213.03 -11116.2,11080.3 v10(-11110.1,11074.2) -11110.1,11060.1 -11090.53,11040.53 -11090.53,11015.47 -11123,10983 -11123,10757 -11074.4,10708.4 -11074.4,10541.44 -11039,10506.04 -11039,10454.35 v1(-11024.65,10440)
  LAY6 w3.8: v3(-12779,12106) -12717,12168 -12717,12205 -12708,12214 -12665,12214 -12583,12132 -12059,12132 -12038,12111 v10(-12038,12110) ; -11697,11219.1 -11646.18,11219.1 -11512.94,11085.86 -11433.66,11085.86 -11422,11074.2 v10(-11110.1,11074.2)
  LAY6 w4: v3(-11838.4,11202.4) -11824.63,11202.4 -11807.93,11219.1 -11697,11219.1
  BOTTOM w4: v3(-11838.4,11202.4) -11833.66,11207.14 U1.K22@-11819.34,11207.14 ; U7.12@-11136.03,10288.3 -11107.7,10288.3 -11101,10295 -11101,10335.46 -11024.65,10411.81 v1(-11024.65,10440) ; v10(-11110.1,11074.2) -11109,11074.2 -11104.3,11069.5 -11096.85,11069.5 R234.2@-11094.85,11071.5
I2C2_SDA: J8.36 R235.2 U1.K24 U7.11 | length 4462.1
  TOP w4: v3(-12759,12088) -12759,12101.5 -12758.12,12102.38 J8.36@-12758.12,12148.55
  LYR3 w3.8: v10(-12057,12089) -12057,12121 -12033.5,12144.5 -11783.5,12144.5 -11759,12169 -11456.96,12169 -11405.2,12117.24 -11405.2,12003 -11317,11914.8 -11317,11630.98 -11192.4,11506.38 -11192.4,11506.29 -11155.8,11469.69 -11155.8,11353.96 -11146.6,11344.76 -11146.6,11329.76 -11117.4,11300.56 -11117.4,11225.28 -11111.83,11219.7 -11108,11215.87 -11108,11125.3 v1(-11100.8,11118.1) -11100.8,11087.8 -11093,11080 -11093,11054.04 -11082.73,11043.77 -11082.73,11012.23 -11115.2,10979.76 -11115.2,10760.24 -11066.6,10711.64 -11066.6,10544.68 -11025,10503.08 v1(-11025,10466)
  LAY6 w3.8: v3(-12759,12088) -12708,12139 -12708,12200.2 -12704.2,12204 -12681,12204 -12606.59,12129.59 -12594.88,12129.59 -12588.29,12123 -12077,12123 -12057,12103 v10(-12057,12089)
  BOTTOM w3.2: U1.K24@-11779.96,11207.14 -11770.16,11197.34 -11733,11197.34
  BOTTOM w4: -11733,11197.34 -11724.66,11197.34 -11717.37,11204.63 -11641.83,11204.63 -11570.66,11133.46 -11570.66,11111.2 -11520.46,11061 -11157.9,11061 v1(-11100.8,11118.1) ; U7.11@-11136.03,10307.99 -11115.01,10307.99 -11109,10314 -11109,10338.78 -11038.65,10409.13 -11038.65,10452.35 v1(-11025,10466)
I2C3_SCL: D40.2 J21.4 R134.2 R208.2 U1.A15 | length 3707.1
  TOP w4: J21.4@-11149.39,11796.09 v5(-11149.39,11818.61)
  LYR3 w3.8: v1(-11008,11995) -10987,11974 -10894,11974 -10844,11924 -10844,11887.73 -10698,11741.73 -10698,11466.73 -10674,11442.73 -10674,11149 -10703,11120 -10703,10874 -10674,10845 -10674,10776.04 -10560,10662.04 v10(-10560,10572)
  LAY6 w3.8: v3(-11933,10836) -11925,10828 -11908,10828 -11805,10725 -11805,10710 -11774,10679 -11656.84,10679 v3(-11646.84,10669) -11601.44,10623.6 -11377.52,10623.6 -11354.92,10601 -10866.68,10601 -10849.68,10618 -10609,10618 -10563,10572 v10(-10560,10572)
  BOTTOM w4: U1.A15@-11957.13,11029.98 -11955,11027.85 -11955,10993.22 -11916,10954.22 -11916,10853 v3(-11933,10836) ; v3(-11646.84,10669) R134.2@-11646.84,10670.75 ; v5(-11149.39,11818.61) -11129.42,11838.58 D40.2@-11129.42,11840 R208.2@-11129.42,11878 -11129.42,11888.58 -11119,11899 -11087,11899 -11075,11911 -11075,11960 -11051,11984 -11019,11984 v1(-11008,11995)
I2C3_SDA: D52.2 J21.3 R125.2 R148.2 U1.B15 | length 3584.4
  TOP w4: J21.3@-11049.39,11796.09 -11048.91,11796.09 v5(-11029,11816)
  LYR3 w3.8: v1(-11008,11965) -10897.73,11965 -10853,11920.27 -10853,11884 -10758.8,11789.8 ; -10758.76,11789.8 -10710.8,11741.84 -10710.8,11466.8 -10683,11439 -10683,11152 -10714,11121 -10714,10873 -10683,10842 -10683,10774 -10590,10681 v10(-10590,10571)
  LAY6 w3.8: v3(-11918,10814) -11905.1,10814 -11820,10728.9 -11820,10704 -11765,10649 -11697,10649 -11681,10665 v3(-11677,10665) -11627.8,10615.8 -11380.76,10615.8 -11358.16,10593.2 -10863.44,10593.2 -10846.44,10610.2 -10629.2,10610.2 v10(-10590,10571)
  BOTTOM w3.2: U1.B15@-11957.13,11049.66 -11947.33,11039.86 -11947.33,10997.79 -11907,10957.46 -11907,10850 -11917,10840 -11917,10815 v3(-11918,10814)
  BOTTOM w4: R148.2@-11683.84,10670.43 -11681.41,10668 -11680,10668 v3(-11677,10665) ; v5(-11029,11816) -11018,11827 D52.2@-11018,11840 R125.2@-11018,11878 -11018,11955 v1(-11008,11965)
INTB: Q14.3 R262.2 U6.31 | length 792.3
  LYR3 w3.8: v10(-11302,11979) -11302,11982 -11292,11992 -11191.04,11992 -11145,11945.96 -11145,11873 -11088,11816 v1(-11088,11813)
  LAY6 w3.8: v3(-11545,11872) -11545,11894 -11460,11979 v10(-11302,11979)
  BOTTOM w4: U6.31@-11545,11842.88 v3(-11545,11872) ; v1(-11088,11813) -11083,11808 -11083,11757 -11102,11738 R262.2@-11103.15,11738 -11092.15,11727 Q14.3@-11070.56,11727
LED0: R166.1 U13.29 | length 2110.4
  LYR3 w3.8: v1(-10880.9,11461.06) -10880.46,11461.06 -10863.4,11444 -10863.4,11315.52 -10869,11309.92 -10869,11165 -10913.2,11120.8 -10913.2,10822.41 -10769.6,10678.81 -10769.6,10490.22 -10769,10489.62 -10769,10307 -10731,10269 v1(-10731,10114)
  BOTTOM w4: v1(-10880.9,11461.06) -10880.9,11462.1 -10878.15,11464.85 U13.29@-10878.15,11485 ; v1(-10731,10114) -10723,10122 -10567.68,10122 -10522.68,10167 -10159.84,10167 R166.1@-10130.45,10137.61
LED0/CFG_EXT: R35.1 R253.2 R283.1 U6.32 | length 385.1
  TOP w4: R283.1@-11280,11958.81 -11280,11974 v3(-11279.5,11974.5)
  LAY6 w3.8: v3(-11528,11887) -11525,11887 -11448,11964 -11291,11964 -11280.5,11974.5 v3(-11279.5,11974.5)
  BOTTOM w4: U6.32@-11529.25,11842.88 -11529.25,11885.75 v3(-11528,11887) ; R253.2@-11280,11958.81 -11280,11974 v3(-11279.5,11974.5) R35.1@-11279.5,11998.41
LED1/CFG_LDO0: R40.1 R308.2 R309.1 U6.33 | length 402.8
  TOP w4: R309.1@-11239.6,11958.81 -11239.6,11974.63 v3(-11239.13,11975.1)
  LAY6 w3.8: v3(-11499,11887) -11434,11952 -11262.23,11952 v3(-11239.13,11975.1)
  BOTTOM w4: U6.33@-11513.5,11842.88 -11513.5,11872.5 v3(-11499,11887) ; R308.2@-11239.6,11958.81 -11239.6,11974.63 v3(-11239.13,11975.1) R40.1@-11239.13,11998.41
LED2: R113.1 R167.1 U13.28 | length 2220.2
  LYR3 w3.8: v1(-10900.88,11460.12) -10871.2,11430.44 -10871.2,11318.76 -10879.48,11310.48 -10879.48,11166.52 -10922,11124 -10922,10820.17 -10777.4,10675.57 -10777.4,10486.98 -10777,10486.58 -10777,10300 -10746,10269 v1(-10746,10139)
  BOTTOM w4: v1(-10900.88,11460.12) -10897.85,11463.15 U13.28@-10897.85,11485 -10897.85,11526.85 R113.1@-10898,11527 ; v1(-10746,10139) -10737,10130 -10571,10130 -10526,10175 -10096.62,10175 R167.1@-10059.23,10137.61
LED2/CFG_LDO1: R165.1 R310.2 R311.1 U6.34 | length 427.8
  TOP w4: R311.1@-11198,11957.81 -11198,11975 v3(-11197.93,11975.07)
  LAY6 w3.8: v3(-11497.75,11866) -11423.75,11940 -11230,11940 -11197.93,11972.07 v3(-11197.93,11975.07)
  BOTTOM w4: U6.34@-11497.75,11842.88 v3(-11497.75,11866) ; R310.2@-11198,11957.81 -11198,11975 v3(-11197.93,11975.07) R165.1@-11197.93,11998.41
LED_USR0: R201.1 U1.E25 | length 261.4
  BOTTOM w3.8: -11593,11001 -11583.26,11001 R201.1@-11572.21,10989.95
  BOTTOM w4: U1.E25@-11760.28,11108.72 -11659.44,11108.72 -11627,11076.28 -11627,11035 -11593,11001
LED_USR1: R202.1 U1.G24 | length 2282.4
  LYR3 w3.8: v10(-11767.1,10348) -11745,10348 -11711.8,10381.2 -11711.8,10527.5 -11614.3,10625 -11614.3,10713.38 -11583,10744.68 v1(-11583,11044)
  LAY6 w3.8: v3(-12880,10451) -12897,10434 -12897,10392 -12884,10379 -12067,10379 -12036,10348 v10(-11767.1,10348)
  BOTTOM w3.2: U1.G24@-11779.96,11148.09 -11770.16,11138.29 -11726,11138.29
  BOTTOM w4: R202.1@-12909.83,10450.86 -12909.69,10451 v3(-12880,10451) ; -11726,11138.29 -11655.05,11138.29 -11583,11066.24 v1(-11583,11044)
LED_USR2: R203.1 U1.F25 | length 2138.4
  LYR3 w3.8: v10(-11752,10362) -11719.6,10394.4 -11719.6,10530.74 -11622.1,10628.24 -11622.1,10896.9 -11616,10903 -11616,11010.7 v1(-11597,11029.7)
  LAY6 w3.8: v3(-12875,10398) -12066,10398 -12030,10362 v10(-11752,10362)
  BOTTOM w4: R203.1@-12909.87,10413.86 -12890.86,10413.86 v3(-12875,10398) ; U1.F25@-11760.28,11128.4 -11656.48,11128.4 -11597,11068.92 v1(-11597,11029.7)
LED_USR3: R204.1 U1.F24 | length 2165.9
  LYR3 w3.8: v10(-11767.1,10375.9) -11727.4,10415.6 -11727.4,10533.98 -11629.9,10631.48 -11629.9,10709.9 -11641,10721 -11641,10902 -11629,10914 -11629,11026 v1(-11612,11043)
  LAY6 w3.8: v3(-12846,10425) -12833,10412 -12059,10412 -12023,10376 -11770,10376 -11769.9,10375.9 v10(-11767.1,10375.9)
  BOTTOM w3.2: U1.F24@-11779.96,11128.4 -11770.08,11118.52 -11746,11118.52
  BOTTOM w4: R204.1@-12908.91,10377.56 -12854.44,10377.56 -12846,10386 v3(-12846,10425) ; -11746,11118.52 -11657.92,11118.52 -11612,11072.6 v1(-11612,11043)
LED_USR4: R205.1 U1.H25 | length 2340.3
  LYR3 w3.8: v10(-11697.9,10399) -11697.9,10470.1 -11684,10484 -11684,10533.22 -11598.7,10618.52 -11598.7,10706.9 -11567.4,10738.2 -11567.4,11015.56 -11561.3,11021.66 -11561.3,11149.3 -11588.65,11176.65 v1(-11683,11176.65)
  LAY6 w3.8: v3(-12804,10440) -12803,10440 -12784,10421 -12048,10421 -12017.5,10390.5 -11800.5,10390.5 -11792,10399 v10(-11697.9,10399)
  BOTTOM w4: R205.1@-12908.95,10340.56 -12835.44,10340.56 -12808,10368 -12808,10436 v3(-12804,10440) ; U1.H25@-11760.28,11167.78 -11718.77,11167.78 -11714.79,11163.8 -11695.85,11163.8 v1(-11683,11176.65)
MB_3V3: D21.2 J21.15
MCASP1_ACLKX: R69.2 U7.7 | length 1036.3
  LYR3 w3.8: v1(-11203.5,11216.26) -11171,11183.76 -11171,11090.27 -11183.2,11078.07 -11183.2,10722.17 -11120.54,10659.51 -11120.54,10529.27 -11067.55,10476.28 -11067.55,10401.55 v1(-11067.5,10401.5)
  BOTTOM w4: R69.2@-11284,11216.26 v1(-11203.5,11216.26) ; U7.7@-11136.03,10386.73 -11082.27,10386.73 v1(-11067.5,10401.5)
MCASP1_AFSX: R71.2 U7.6 | length 1036.3
  LYR3 w3.8: v1(-11148.44,11287.1) -11148.44,11223.22 -11131.8,11206.57 -11131.8,11055.76 -11122,11045.96 -11122,11005.96 -11135,10992.96 -11135,10756.99 -11082.2,10704.19 -11082.2,10538.2 -11052.65,10508.65 v1(-11052.65,10422)
  BOTTOM w4: v1(-11148.44,11287.1) R71.2@-11148.44,11318 ; U7.6@-11136.03,10406.41 -11097.59,10406.41 -11082,10422 v1(-11052.65,10422)
MCASP1_AXR0: R72.2 U7.5 | length 894.7
  LYR3 w3.8: v1(-11204.5,11154.86) -11190.6,11140.96 -11190.6,11098.4 -11202.8,11086.2 -11202.8,10714.04 -11140.14,10651.38 -11140.14,10521.14 -11096.35,10477.35 -11096.35,10440 v1(-11110.25,10426.1)
  BOTTOM w4: R72.2@-11284,11154.86 v1(-11204.5,11154.86) ; U7.5@-11136.03,10426.1 v1(-11110.25,10426.1)
MCASP1_AXR1: R245.2 U7.4 | length 933.2
  LYR3 w3.8: v1(-11204.5,11185.26) -11182.8,11163.56 -11182.8,11095.16 -11195,11082.96 -11195,10717.28 -11132.34,10654.62 -11132.34,10524.38 -11082.45,10474.49 v1(-11082.45,10445.78)
  BOTTOM w4: R245.2@-11284,11185.26 v1(-11204.5,11185.26) ; U7.4@-11136.03,10445.78 v1(-11082.45,10445.78)
MCASP1_AXR2: R247.2 U7.3 | length 800.7
  LYR3 w3.8: v1(-11204.5,11116.36) -11204.5,11097.5 -11210.6,11091.4 -11210.6,10710.8 -11147.94,10648.14 -11147.94,10502.87 v1(-11110.25,10465.18)
  BOTTOM w4: R247.2@-11284,11116.36 v1(-11204.5,11116.36) ; U7.3@-11136.03,10465.47 -11112.29,10465.47 -11112,10465.18 v1(-11110.25,10465.18)
MCASP1_AXR3: R246.2 U7.2 | length 1017.9
  LYR3 w3.8: v1(-11177.8,11268) -11177.8,11230.49 -11147.4,11200.09 -11147.4,11080.49 -11159.6,11068.29 -11159.6,10731.95 -11090,10662.35 -11090,10519.82 v1(-11067.09,10496.91)
  BOTTOM w4: R246.2@-11286,11246.64 -11235.36,11246.64 -11214,11268 v1(-11177.8,11268) ; U7.2@-11136.03,10485.15 -11112.73,10485.15 -11100.97,10496.91 v1(-11067.09,10496.91)
MCU_3V3: C22.1 C23.1 C37.1 C38.1 C39.1 C40.1 C41.1 C96.1 FB5.2 J11.1 L5.2 R117.1 U9.13 U9.22 U9.34 U9.44 | length 1531.8
  TOP w4: v3(-10403,11273.56) -10399,11273.56 -10384.56,11273.56 -10384.51,11273.51
  TOP w15: v3@-10399,11273.56 -10398.95,11273.51 -10384.51,11273.51 -10355,11244 -10355,11095 ; J11.1@-10363.16,10479.56 -10386.72,10456 -10431,10456 -10455,10480 -10455,10533 -10428,10560 -10343,10560 -10306,10597 -10306,10761 -10355,10810 -10355,11068 ; v5(-10268,11081) -10341,11081 ; -10355,11068 -10355,11081 ; -10355,11068 -10342,11081 ; -10355,11081 -10355,11095 ; -10355,11081 -10342,11081 ; -10355,11095 -10341,11081 ; -10342,11081 -10341,11081
  BOTTOM w4: C37.1@-10450.3,11471.3 C37.1@-10450.3,11472.7
  BOTTOM w10: C39.1@-10426.12,11273.56 v3(-10403,11273.56) -10399,11273.56 -10398.95,11273.51 U9.13@-10377.05,11273.51 ; U9.34@-10172.32,11517.61 v3(-10172.32,11541.68) -10169.71,11541.68 -10154.12,11557.27 C41.1@-10154.12,11560 -10155,11560.88 C96.1@-10155,11603 ; U9.44@-10105.39,11352.25 -10071.75,11352.25 -10059.16,11364.84 C40.1@-10045.56,11364.84 ; v3(-10059,11502) -10044.53,11516.47 R117.1@-10043.84,11516.47
  BOTTOM w12: L5.2@-10301.09,11098.56 -10294.52,11091.99 C23.1@-10294.52,11067.27 -10294.33,11067.46 C22.1@-10267.57,11067.46 -10267.57,11080.57 v5(-10268,11081) ; C40.1@-10045.56,11364.84 v3(-10045.56,11383.09)
  other v3: -10421.82,11441.02 -10422,11457
MCU_ERRORN: TP15.1 U1.D1 | length 173.2
  BOTTOM w4: v5(-12349.6,10983) -12340,10992.6 -12340,11013.7 -12264.66,11089.04 U1.D1@-12232.72,11089.04
MCU_I2C0_SCL: Q6.2 R186.2 U1.A8 | length 4188.8
  TOP w4: v1(-10524,11883) -10528.13,11887.13 R186.2@-10528.13,11911.56 -10520.97,11918.72 Q6.2@-10520.97,11949.2
  LYR3 w3.8: v1(-10524,11883) -10445,11962 -10222,11962 -10031.8,11771.8 -10031.8,11427.8 -9942.59,11338.59 -9942.59,10682.45 -10029.64,10595.4 -10333.18,10595.4 -10347.08,10609.3 -10383.7,10609.3 v10(-10384.7,10610.3)
  LAY6 w3.8: v3(-12097.84,11003.7) -12080.14,10986 -12062,10986 -11978,10902 -11924,10902 -11783,10761 -11578,10761 -11527.91,10710.91 -11343.1,10710.91 -11342.91,10710.9 -11317.01,10685 -11149,10685 -11135,10671 -10881,10671 -10860.8,10650.8 -10453.05,10650.8 -10412.55,10610.3 v10(-10384.7,10610.3)
  BOTTOM w4: v3(-12097.84,11003.7) -12094.92,11006.62 U1.A8@-12094.92,11029.98
MCU_I2C0_SDA: Q7.2 R226.2 U1.D10 | length 4171.7
  TOP w4: v1(-10441,11885) -10442.89,11886.89 R226.2@-10442.89,11911.56 -10434.32,11920.13 Q7.2@-10434.32,11949.2
  LYR3 w3.8: v1(-10441,11885) -10441,11922 -10411,11952 -10223.04,11952 -10039.6,11768.56 -10039.6,11423.6 -9950.39,11334.39 -9950.39,10685.69 -10032.88,10603.2 -10329.94,10603.2 -10350.94,10624.2 -10401.2,10624.2 v10(-10403,10626)
  LAY6 w3.8: v3(-12092.03,11087.06) -12092.03,11028.03 -11976,10912 -11922,10912 -11779,10769 -11572,10769 -11521.71,10718.71 -11339.86,10718.71 -11336.7,10718.7 -11312.5,10694.5 -11144.51,10694.5 -11129.01,10679 -10874,10679 -10853.6,10658.6 -10449.81,10658.6 -10417.21,10626 v10(-10403,10626)
  BOTTOM w4: v3(-12092.03,11087.06) -12090.05,11089.04 -12089.67,11089.04 -12079.47,11099.24 -12071.01,11099.24 -12060.81,11089.04 U1.D10@-12055.56,11089.04
MCU_OBSCLK0: R217.2 R229.1 | length 2601.5
  LYR3 w3.8: v1(-11390,11895) -11409,11876 -11409,11520 -11389.9,11500.9 -11258.81,11500.9 -11243.2,11485.29 -11243.2,11485.2 -11206.6,11448.6 -11206.6,11241.6 -11159.2,11194.2 -11159.2,11085.38 -11171.4,11073.18 -11171.4,10727.06 -11105.64,10661.3 v10(-11105.64,10638.3)
  LAY6 w3.8: v3(-12063.14,10885.85) -12047.84,10885.85 -12046.69,10887 -12009,10887 -11993,10871 -11933.99,10871 -11795.99,10733 -11601.32,10733 -11544.32,10676 -11356.3,10676 -11336.5,10656.2 -11169.21,10656.2 -11151.31,10638.3 v10(-11105.64,10638.3)
  BOTTOM w4: R217.2@-12073.86,10895.82 -12073.11,10895.82 v3(-12063.14,10885.85) ; v1(-11390,11895) -11386.73,11898.27 R229.1@-11386.73,11942.17
MCU_PORZ: R159.2 SW2.2 U1.D2 U17.18 | length 4514
  TOP w4: v1(-12634,9694) -12634,9709.36 -12627.21,9716.15 R159.2@-12627.21,9733 ; v1(-10036,10438) -10034.37,10436.37 SW2.2@-9996.99,10436.37
  LYR3 w3.8: v1(-12634,9694) -12682,9694 -12695,9707 -12695,9785 -12640,9840 -12640,10081 -12553.7,10167.3 -12553.7,10309.3 -12495.5,10367.5 -12495.5,10637.5 -12407,10726 -12407,10860.7 -12312,10955.7 -12312,10964.7 ; v10(-10482,10674) -10493,10663 -10493,10463 -10451,10421 -10372,10421 -10348.6,10444.4 -10200.4,10444.4 -10147,10391 -10083,10391 v1(-10036,10438)
  LYR3 w4: -12312,10964.7 v1(-12312,10991.7)
  LAY6 w3.8: -12017.52,10964.7 -11972.62,10919.8 -11917.8,10919.8 -11775,10777 -11568.96,10777 -11518.47,10726.51 -11333.47,10726.51 -11310.48,10703.52 -11140.29,10703.52 -11124.77,10688 -10869,10688 -10847.4,10666.4 -10489.6,10666.4 v10(-10482,10674)
  LAY6 w4: v3(-12191.96,11089.04) -12173.63,11089.04 -12158.47,11104.2 -12082.2,11104.2 -12076,11098 -12076,11023.18 -12017.52,10964.7
  BOTTOM w3.2: -12245.46,11079.24 -12222.84,11079.24 U1.D2@-12213.04,11089.04
  BOTTOM w4: v1(-12634,9694) -12629,9699 -12629,9721.58 -12623.99,9726.59 U17.18@-12605.18,9726.59 ; v1(-12312,10991.7) -12312,11027.7 -12260.46,11079.24 -12245.46,11079.24 ; U1.D2@-12213.04,11089.04 v3(-12191.96,11089.04)
MCU_RESETSTATZ: TP16.1 U1.B12 | length 219
  TOP w4: v5(-11960.6,10944) -11958,10941.4 -11958,10932.4 TP16.1@-11936.55,10910.95
  BOTTOM w3.2: U1.B12@-12016.18,11049.66 -12026.07,11039.77 -12026.07,11025.92 -12032.6,11019.39 -12032.6,10972.61 -12031,10971.01 -12031,10956.79 -12027.21,10953 -11988,10953
  BOTTOM w4: -11988,10953 -11979,10944 v5(-11960.6,10944)
MCU_RESETZ: R126.2 TP3.1 U1.E11 | length 238.7
  TOP w4: v5(-12052.76,11108.13) -12052.76,11084.76 -12042,11074 -12042,10916.62 TP3.1@-12035.77,10910.39
  BOTTOM w4: v5(-12052.76,11108.13) -12052.17,11108.72 U1.E11@-12035.87,11108.72 ; v5(-12035.91,10911.79) R126.2@-12019.14,10911.79
MCU_SPI1_CLK: U1.D4 U11.8 | length 1666.4
  LAY6 w3.8: v3(-12170.14,11065.97) -12170,11065.83 -12170,11065.58 -12126.2,11021.78 -12126.2,10858.19 -12088.01,10820 -12022.66,10820 -12003.76,10838.9 -11989.89,10838.9 -11970.99,10820 -11961,10820 -11936,10795 -11936,10778.69 -11925.2,10767.89 -11925.2,10740.85 -11904.65,10720.3 -11899.96,10720.3 -11755.66,10576 -11400.59,10576 -11382.21,10557.62 -11156.7,10557.62 -11144.28,10545.2 -11054.47,10545.2 -11040.27,10531 -11001,10531 v3(-10998.9,10533.1)
  BOTTOM w4: U1.D4@-12173.66,11089.04 -12173.66,11069.66 -12170.14,11066.14 v3(-12170.14,11065.97) ; U11.8@-11031.42,10630.76 -11031.42,10601.42 -10998.9,10568.9 v3(-10998.9,10533.1)
MCU_SPI1_CS1: U1.E5 U11.1 | length 1766
  LAY6 w3.8: v3(-12153,11091) -12153,11067 -12112,11026 -12112,10911 -12060,10859 -11964,10859 -11946.9,10841.9 -11946.9,10822.59 -11924.2,10799.89 -11924.2,10783.58 -11913,10772.38 -11913,10745.34 -11899.76,10732.1 -11891.14,10732.1 -11780.24,10621.2 -11760.2,10621.2 -11726.8,10587.8 -11395.7,10587.8 -11377.32,10569.42 -11151.81,10569.42 -11139.39,10557 -11040.2,10557 v3(-11032.1,10548.9)
  BOTTOM w4: U1.E5@-12153.98,11108.72 -12153.98,11091.98 v3(-12153,11091) ; v3(-11032.1,10548.9) -11067,10583.8 -11067,10655 -11031.42,10690.58 U11.1@-11031.42,10803.98
MCU_SPI1_D0: U1.A6 U11.7 | length 1663.7
  LAY6 w3.8: v3(-12153.5,10971.2) -12153.5,10844.51 -12080.99,10772 -11957.04,10772 -11944.8,10759.76 -11944.8,10732.72 -11768.48,10556.4 -11408.72,10556.4 -11390.34,10538.02 -11164.83,10538.02 -11152.41,10525.6 -11062.6,10525.6 -11041.3,10504.3 v3(-10978,10504.3)
  BOTTOM w4: v3(-12153.5,10971.2) -12134.3,10990.4 U1.A6@-12134.3,11029.98 ; U11.7@-11005.83,10630.76 -11005.83,10601.83 -10978,10574 v3(-10978,10504.3)